# EAGLE board PowerModule (EAGLE 9.6.2)
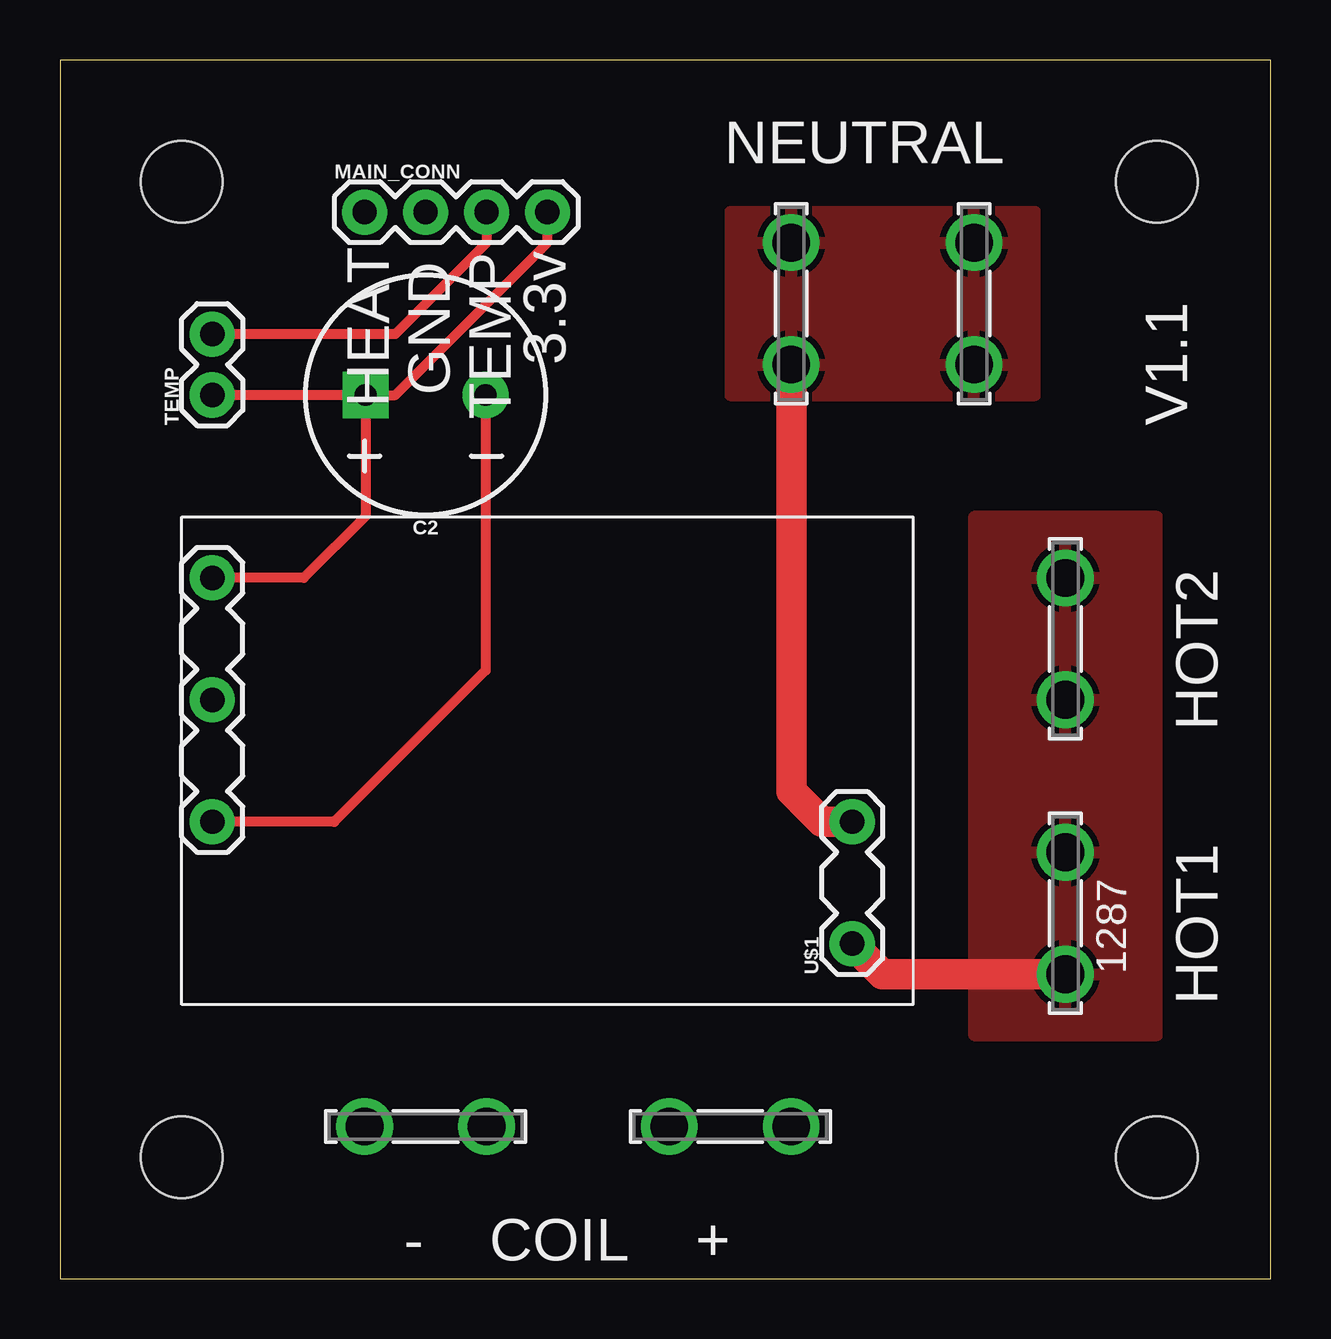
[diagram p0: board, top side]
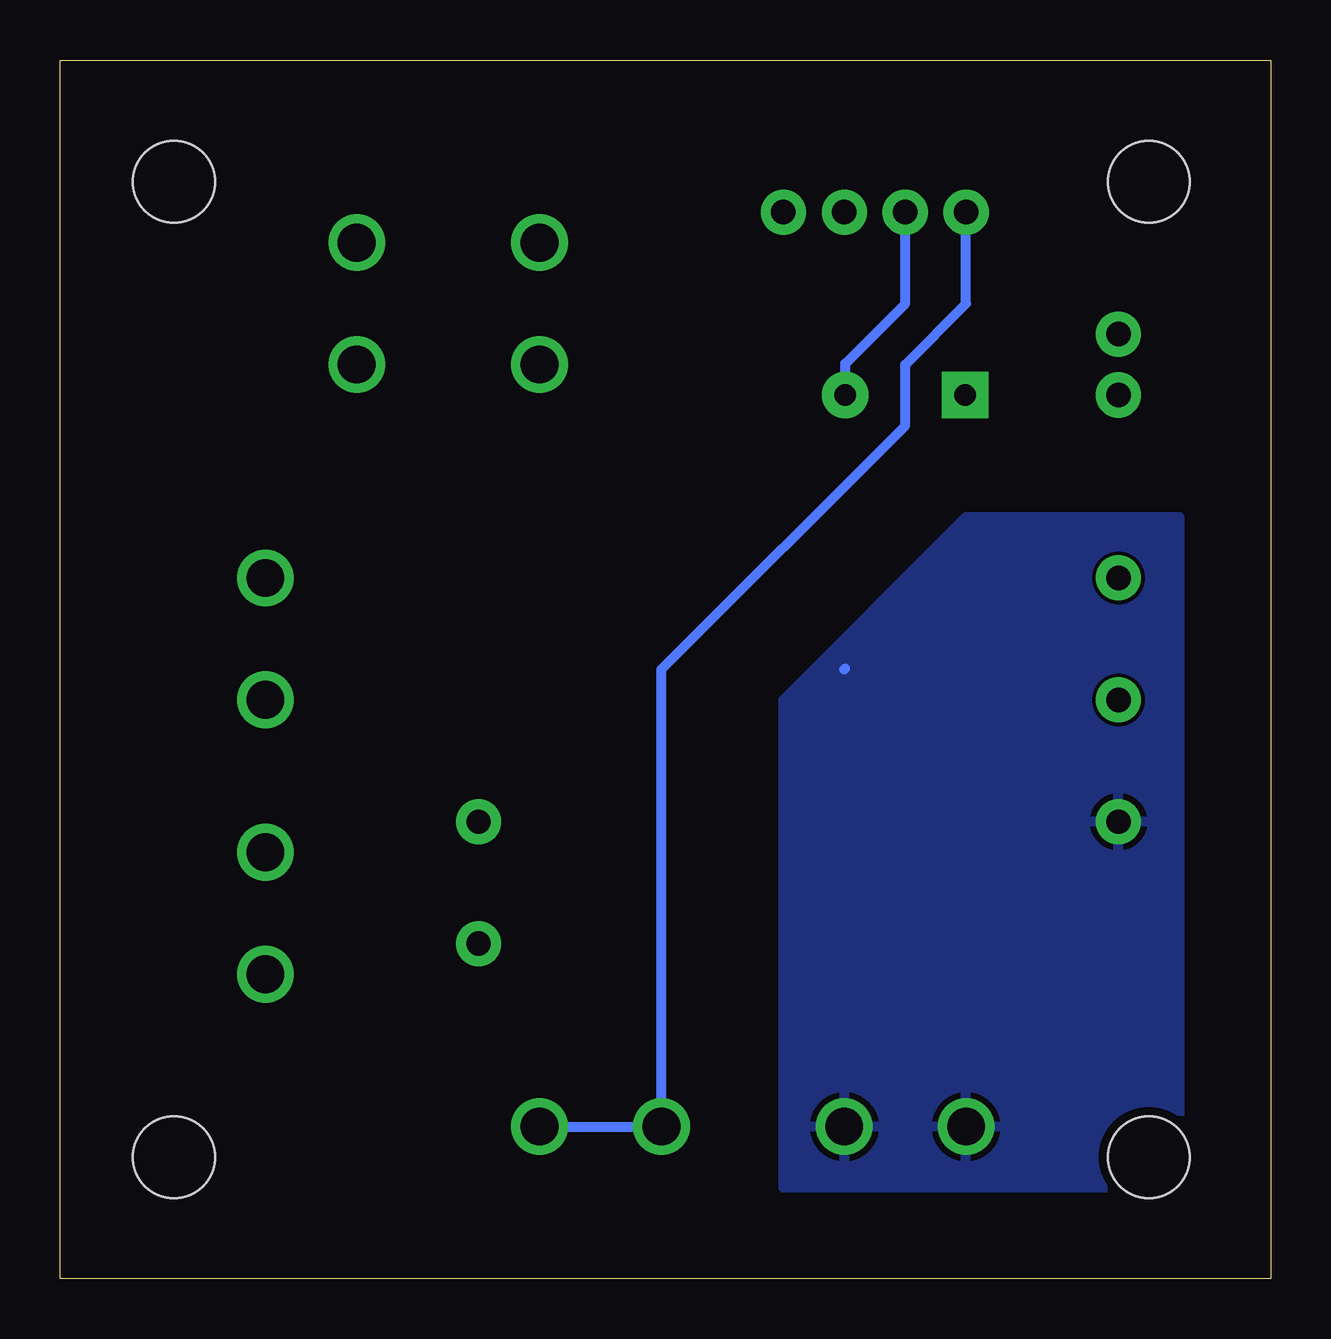
[diagram p1: board, bottom side, seen from below]

Size 50.47 x 50.79 mm. Coordinates in mm from the lower left corner, seen from the top.
Outline: 0,0 50.47,0 50.47,50.79 0,50.79 0,0
Copper layers (1*16): Top 0.035559375mm / dielectric 1.6mm / Bottom 0.035559375mm
Design rules "oshpark-2layer": minimum track width 6mil, minimum drill 10mil, track to track 6mil, track to pad 6mil, pad to pad 6mil, via to via 6mil, smd to smd 6mil, copper to edge 15mil, drill to drill 6mil, minimum pad ring 5mil, minimum via ring 5mil, stop-mask expansion 2.5mil, vias tented up to drill 0mil, thermal gap 10mil
Holes 3.4 mm at 45.72,5.08 5.08,5.08 45.72,45.72 5.08,45.72

## Footprints (pad centres in the part's own frame; a part is rotated, then mirrored left to right if it is on the bottom)
CPOL-RADIAL-5MM-10MM = drill 0.9 pad 1.93 square: + 2.5,0 | drill 0.9 pad 1.93: - -2.5,0
CONN_1287_KEY = drill 1.575 pad 2.083: 1 0,0; 2 5.08,0
1X04 = drill 1.016 pad 1.88: 1 0,0; 2 2.54,0; 3 5.08,0; 4 7.62,0
1X02 = drill 1.016 pad 1.88: 1 0,0; 2 2.54,0
1X03 = drill 1.016 pad 1.88: 5 10.16,26.67; GND 5.08,26.67; HOT 0,0; NEUTRAL 5.08,0; VCC 15.24,26.67

## Placement (x,y rotation side)
C2  1mF  [CPOL-RADIAL-5MM-10MM]  15.24,36.83 180 top
COIL_NEG  1287  [CONN_1287_KEY]  12.7,6.35 0 top
COIL_POS  1287  [CONN_1287_KEY]  25.4,6.35 0 top
HOT1  1287  [CONN_1287_KEY]  41.91,12.7 90 top
HOT2  1287  [CONN_1287_KEY]  41.91,24.13 90 top
MAIN_CONN  [1X04]  12.7,44.45 0 top
NEUTRAL1  1287  [CONN_1287_KEY]  38.1,38.1 90 top
NEUTRAL2  1287  [CONN_1287_KEY]  30.48,38.1 90 top
TEMP  [1X02]  6.35,36.83 90 top
U$1  3.3V_PSU  [1X03]  33.02,13.97 90 top

## Library data of the parts
C2 = SparkFun-Capacitors; PROD_ID: CAP-09538
COIL_NEG COIL_POS HOT1 HOT2 NEUTRAL1 NEUTRAL2 = Custom; COPYRIGHT: Copyright (C) 2022 Ultra Librarian. All rights reserved.; DIGI-KEY_PART_NUMBER_1: 1287K-ND; DIGI-KEY_PART_NUMBER_2: 36-1287-ND; DIGI-KEY_PART_NUMBER_3: 1528-1877-ND; DIGI-KEY_PART_NUMBER_4: 36-1287-NDL; MANUFACTURER_PART_NUMBER: 1287; MFR_NAME: Keystone Electronics
MAIN_CONN = SparkFun-Connectors; PROD_ID: CONN-09696
TEMP = SparkFun-Connectors
U$1 = Custom

## Nets
GND: C2.- COIL_NEG.1 COIL_NEG.2 MAIN_CONN.2 U$1.GND
HEAT: COIL_POS.1 COIL_POS.2 MAIN_CONN.1
HOT: HOT1.1 HOT1.2 HOT2.1 HOT2.2 U$1.HOT
NEUTRAL: NEUTRAL1.1 NEUTRAL1.2 NEUTRAL2.1 NEUTRAL2.2 U$1.NEUTRAL
TEMP: MAIN_CONN.3 TEMP.2
VCC: C2.+ MAIN_CONN.4 TEMP.1 U$1.VCC

## Tracks (layer width: path | path; a pad name or v marks a point on that pad's centre or on a via)
GND
  Top 0.406: C2.- 17.74,25.36 11.43,19.05 U$1.GND
  Bottom 0.406: 17.74,25.44 17.78,25.4 | MAIN_CONN.2 15.24,40.64 17.74,38.14 C2.-
  pour Bottom: 20.32,3.81 20.32,24.13 12.7,31.75 3.81,31.75 3.81,3.81
HEAT
  Bottom 0.406: COIL_POS.2 COIL_POS.1 25.4,25.4 15.24,35.56 15.24,38.1 12.7,40.64 MAIN_CONN.1
HOT
  Top 1.27: HOT1.1 34.29,12.7 U$1.HOT
  pour Top: 38.1,31.75 38.1,10.16 45.72,10.16 45.72,31.75
NEUTRAL
  Top 1.27: NEUTRAL2.1 30.48,20.32 31.75,19.05 U$1.NEUTRAL
  pour Top: 27.94,36.83 40.64,36.83 40.64,44.45 27.94,44.45
TEMP
  Top 0.406: MAIN_CONN.3 17.78,43.18 13.97,39.37 TEMP.2
VCC
  Top 0.406: C2.+ TEMP.1 | U$1.VCC 10.16,29.21 12.74,31.79 C2.+ | C2.+ 13.97,36.83 20.32,43.18 MAIN_CONN.4

## Text on the board
tPlace: NEUTRAL | 3.3v | GND | HEAT | TEMP | V1.1 | HOT2 | HOT1 | - COIL +